# Altium PCB Button_PCB.PcbDoc
Units mil, origin at the board's own origin, x right, y up, seen from the top; angles counter-clockwise.
Board outline 2050 x 2020 mil, 2 copper layers (Top Layer, Bottom Layer); 5 components, 38 nets, 22 pads, 0 vias.
Unrouted connection lines stored in the file: 1.
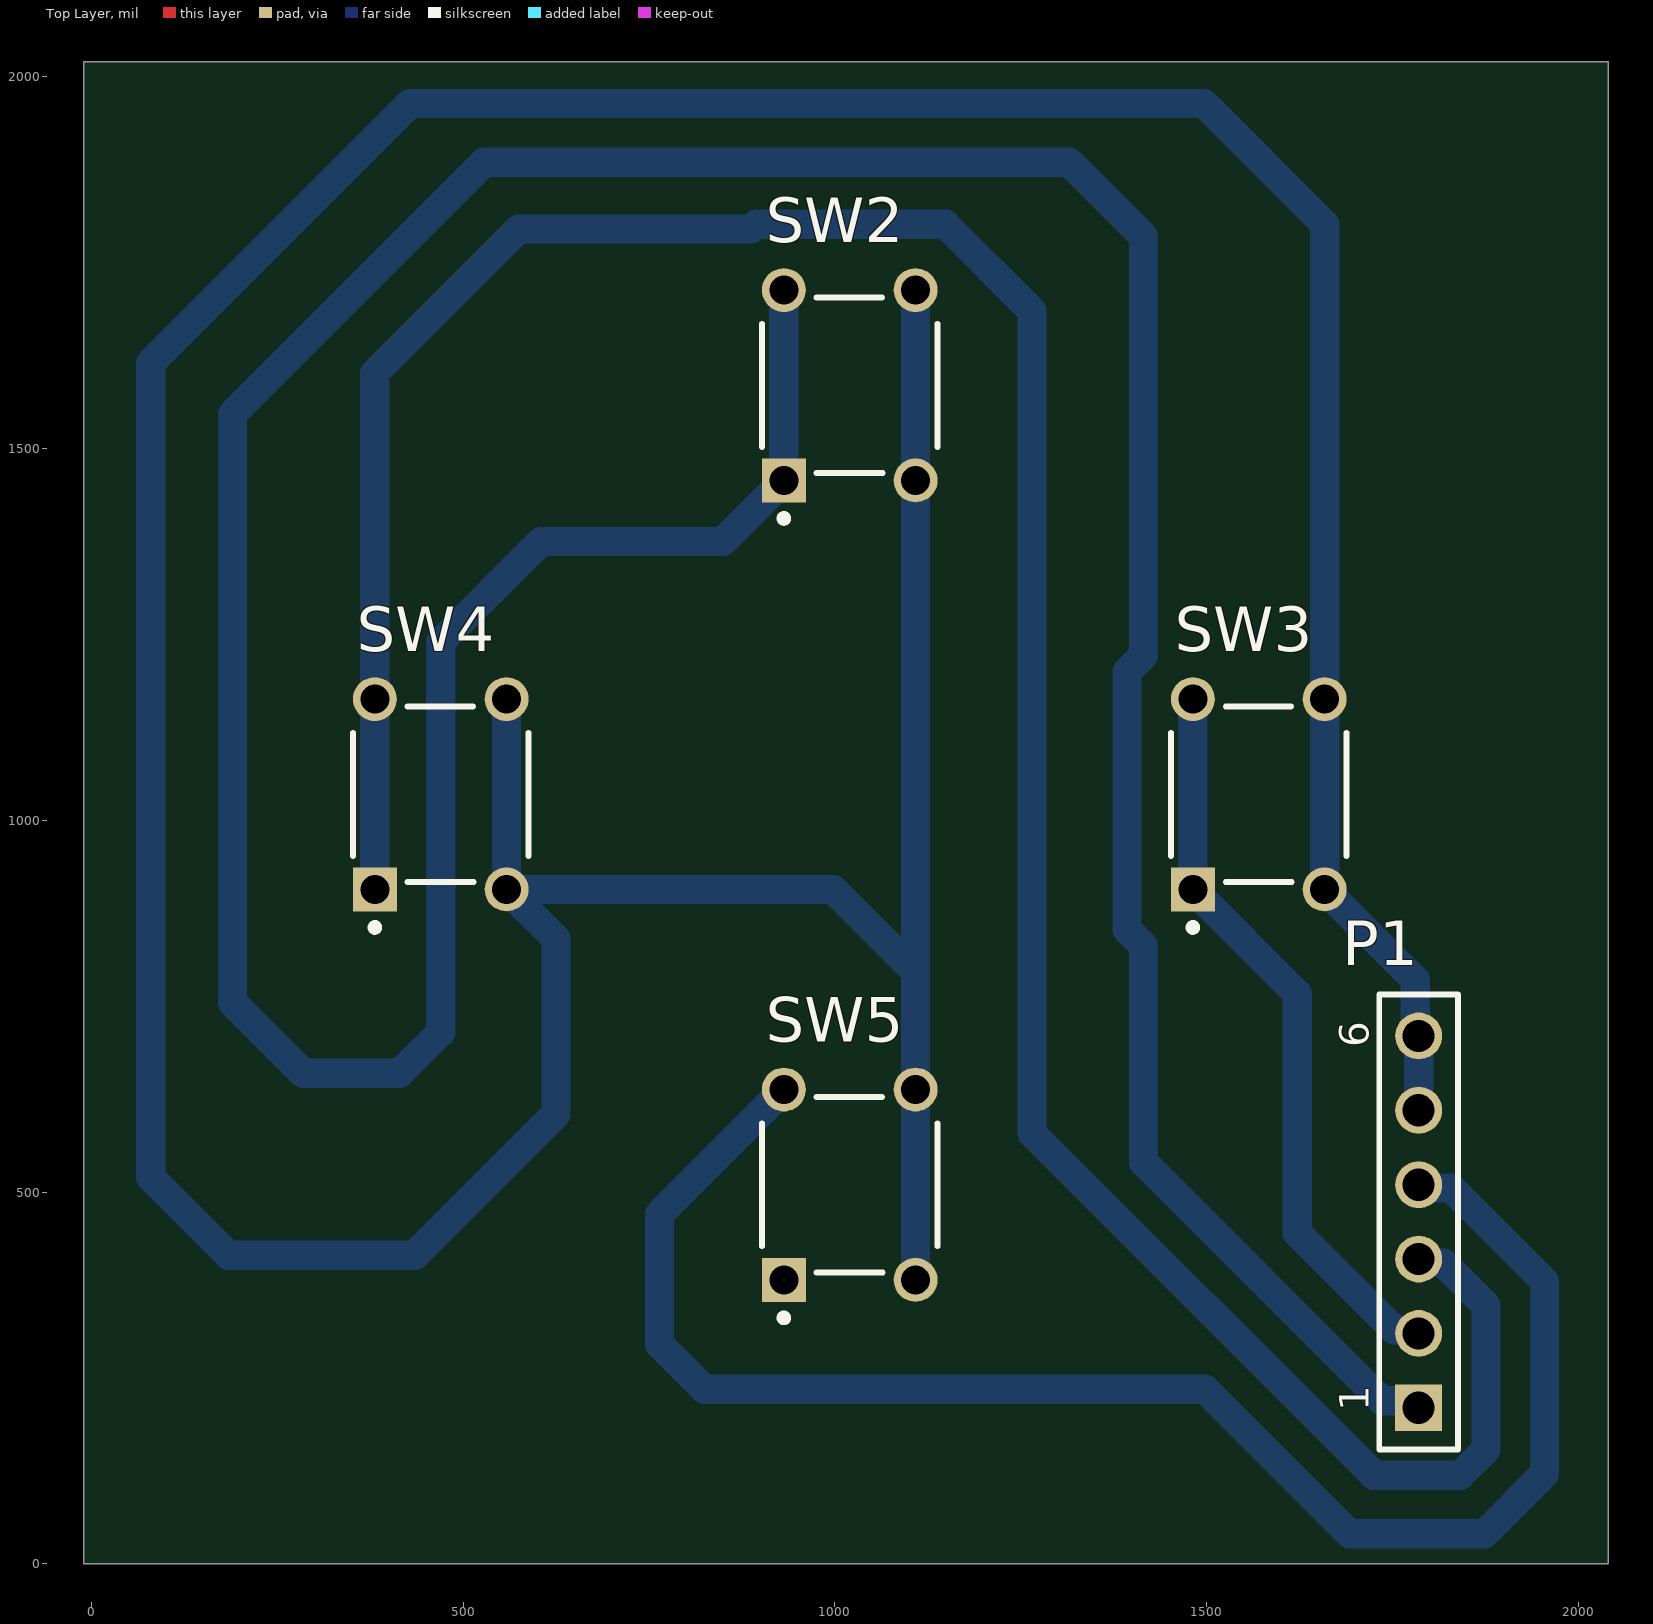
[diagram p0: Top Layer view]
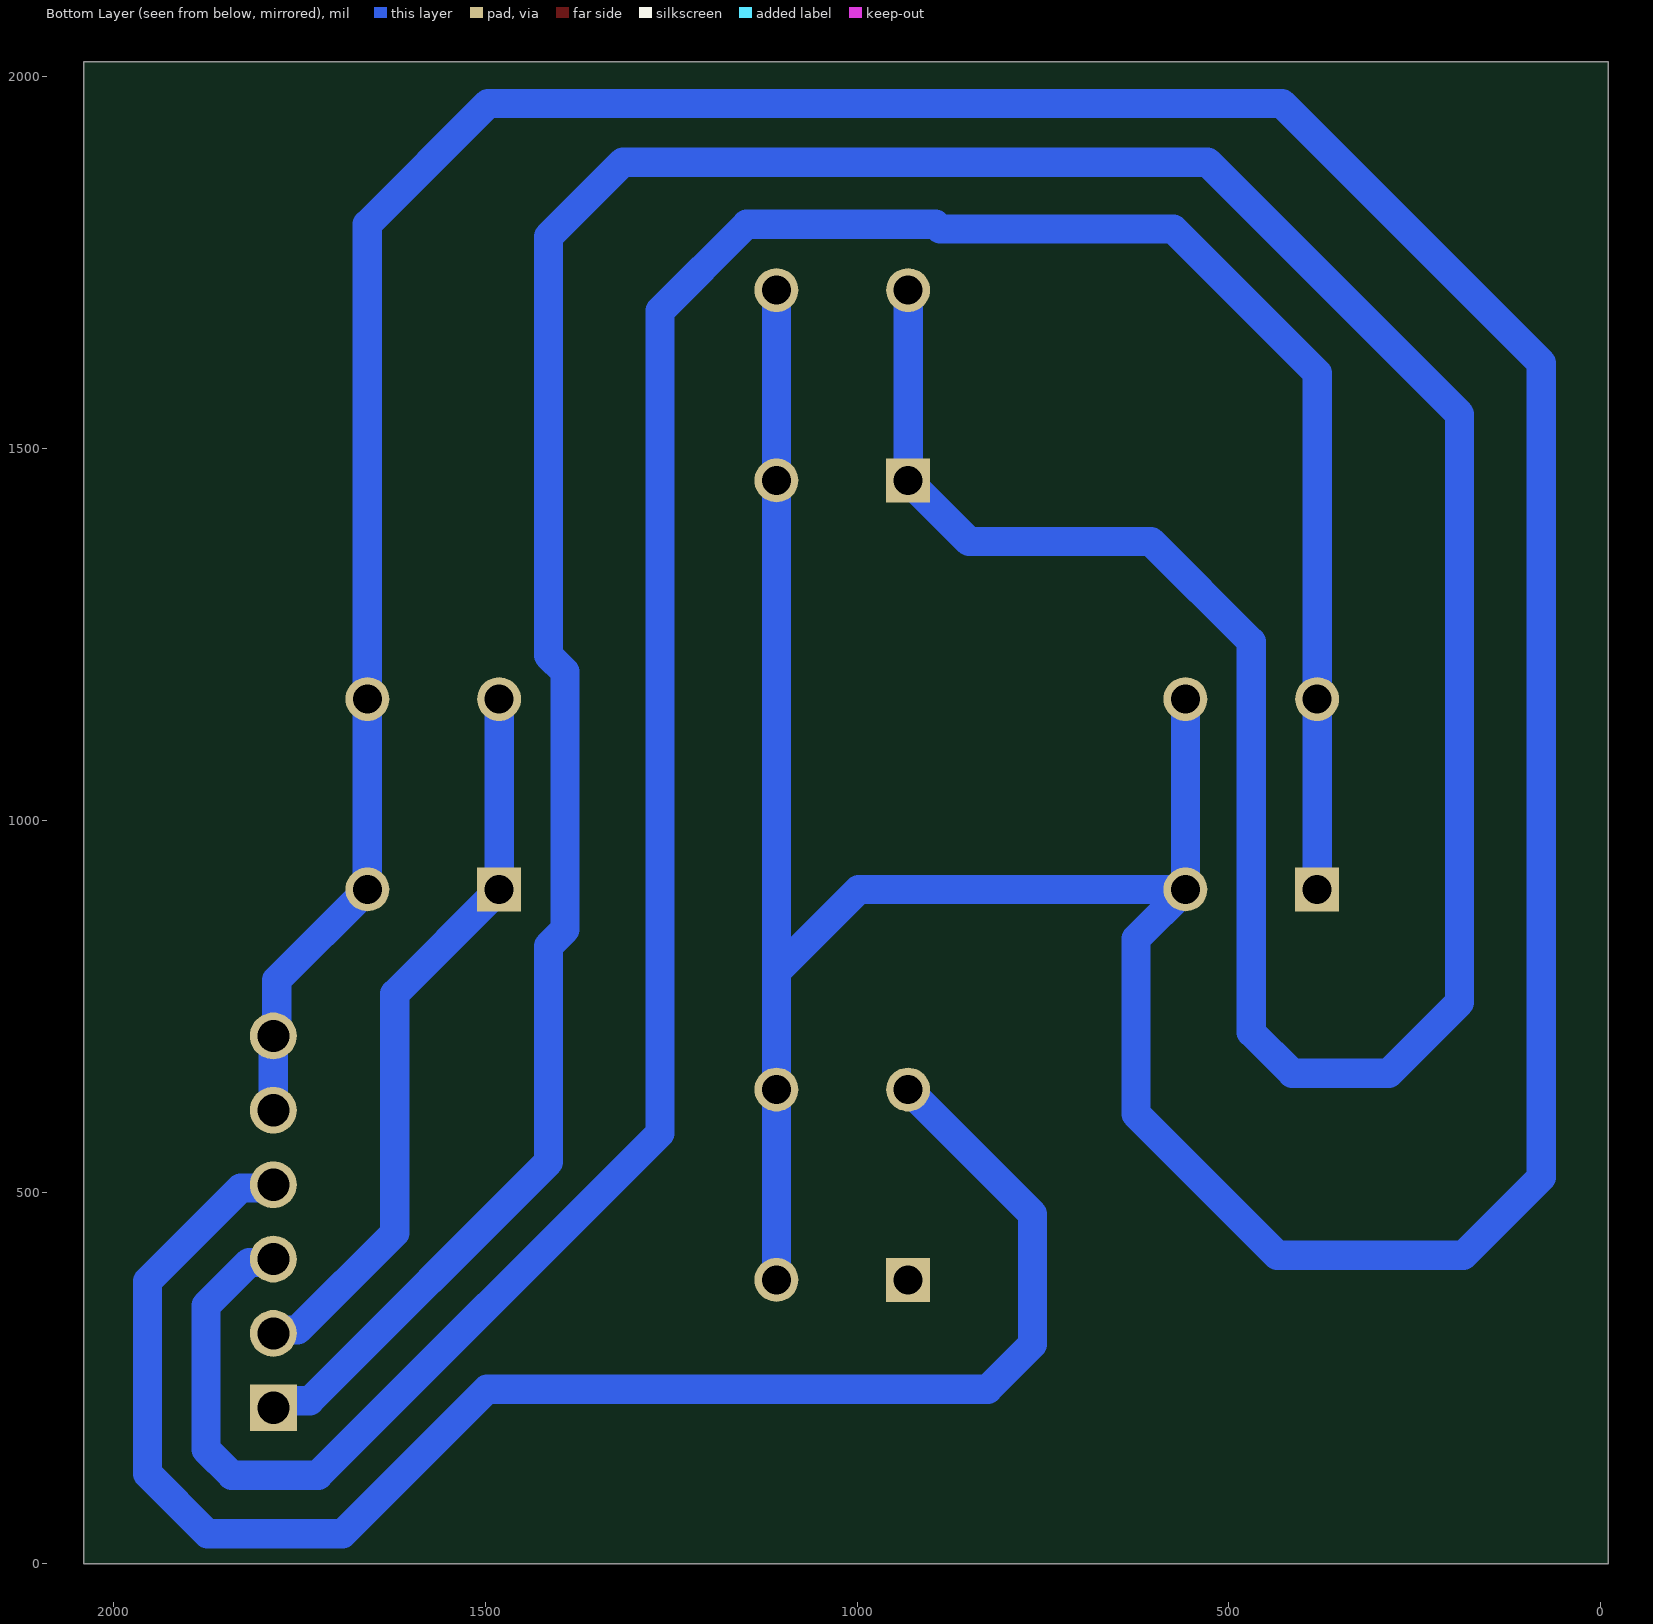
[diagram p1: Bottom Layer view, seen from below]

## Layer stack, top to bottom
Top Solder: solder mask 0.4, Solder Resist, Dk 3.5
Top Layer: signal copper 1.4
Dielectric 1: dielectric 12.6, FR-4, Dk 4.8
Bottom Layer: signal copper 1.4
Bottom Solder: solder mask 0.4, Solder Resist, Dk 3.5

## Board outline
-10,0 2040,0 2040,2020 -10,2020

## Design rules (kind name [scope] priority, off if disabled: settings)
Clearance [All] p1: gap=39.37 ignorepadtopadclearanceinfootprint=FALSE
PolygonConnect [All] p1: connectstyle=Relief reliefconductorwidth=10 reliefentries=4 polygonreliefangle="90 Angle" airgapwidth=10
RoutingVias [All] p1: holewidth=28 width=50 viastyle="Through Hole" minholewidth=28 minwidth=50 maxholewidth=28 maxwidth=50
SolderMaskExpansion [All] p1: expansion=4 istentingtop=FALSE
Width [All] p1: maxlimit=59.06 minlimit=10 preferedwidth=39.37
30 further rules are at their usual default settings.

## Components (designator, comment, footprint, x,y, rotation, side; value= is the part's Value field where it differs from the comment)
P1 "61300611121" 61300611121 1785,460 r90 top
SW2 "1825910-6" TECO-1825910-6_V 1020,1585 r90 top
SW3 "1825910-6" TECO-1825910-6_V 1570,1035 r90 top
SW4 "1825910-6" TECO-1825910-6_V 470,1035 r90 top
SW5 "1825910-6" TECO-1825910-6_V 1020,510 r90 top

## Footprints (in the part's own frame and the unit in brackets; to place one, negate y for a bottom-side part, rotate by r counter-clockwise, add the part's x,y. Pads: shape width x height; smd on the part's side, far side on the other; paste and mask are expansions set on the pad)
61300611121 [mm] "Pin Header, pitch 2.54 mm, THT, Vertical, single row, 6p"
  rect 1.6x1.6 hole 1.1: 1(-6.35,0)
  round 1.6 hole 1.1: 2(-3.81,0) 3(-1.27,0) 4(1.27,0) 5(3.81,0) 6(6.35,0)
  silkscreen extent -7.77,-1.35 7.77,1.35, body extent -7.62,-1.27 7.62,1.27, height 8.57
TECO-1825910-6_V [mm] "Switch, 4-Leads, Body 5.99x5.99mm"
  rect 1.5x1.5 hole 0.99: 1(-3.25,2.25)
  round 1.5 hole 0.99: 2(3.25,2.25) 3(-3.25,-2.25) 4(3.25,-2.25)
  silkscreen extent -4.67,-2.99 2.99,3, body extent -3,-2.99 2.99,3, height 5

## Part data
P1: library part CMP-1502-01070-1, "THT Vertical Pin Header WR-PHD, Pitch 2.54 mm, Single Row, 6 pins", Contact Resistance=20mOhm, Manufacturer="Wurth Elektronik", Operating Temperature=-40to105degC, Rated Current=3A, Withstanding Voltage=500VAC, Working Voltage=250VAC, Datasheet URL=https://katalog.we-online.de/em/datasheet/6130xx11121.pdf, Gender=Male, Manufacturer URL=http://www.we-online.de, Mounting Technology=THT, Orientation=Vertical, Package Reference=61300611121, Packaging=Bag, Part Number=61300611121, Pin Number=6, Pitch=2.54mm, Publisher=WurthElektronik, Row Number=Single
SW2 SW3 SW4 SW5: library part CMP-1684-00021-1, "Tact Switch, SPST-NO, 0.05 A, -35 to 85 degC, 4-Pin THD, RoHS, Bulk", Actuator Color=Black, Contact Rating @ Voltage=0.05A@24VDC, Dielectric Strength=500VAC, Manufacturer="TE Connectivity", Maximum AC Voltage Rating=N/A, Maximum Contact Resistance=100mOhm, Maximum DC Voltage Rating=24V, Minimum Insulation Resistance=100MOhm, Operating Temperature=-35to85C, Package Description="4-Pin Through Hole Device, Body 5.99 x 5.99 mm, Pitch 6.5 mm", Package Reference=THD, Actuator Length=1.4mm, Actuator Material=PolybutyleneTerephthalate, Actuator Style=RoundButton, Base Material=N/A, Body Orientation=Straight, Bushing Type=Unthreaded, Contact Material=CopperAlloy, Contact Plating=Silver, Datasheet URL=http://www.te.com/commerce/DocumentDelivery/DDEController?Action=showdoc&DocId=Customer+Drawing%7F1825910%7FC9%7Fpdf%7FEnglish%7FENG_CD_1825910_C9.pdf%7F1825910-6, Datasheet Version="Rev. C9", Dimension=5.99x5mm, Electrical Life=100000Cycles, Family=1825910, Function=MomentaryContact, Housing Material=N/A, Illumination=N/R, Manufacturer URL=http://www.te.com, Mechanical Life=100000Cycles, Mounting=ThroughHole, Packaging=N/A, Part No=1825910-6, Pole Throw Configuration=SPST, Product Weight=N/A, RoHS=Yes, Seal Description=N/A, Seal Location=N/A, Switch Configuration=OFF(ON), Terminal Type=PCPins, Thread Size=N/R

## Nets (pads, with @x,y where several pads share a name; then routed paths per layer and width w, separated by ;. In a path a pad name is that pad's centre, name@x,y a point inside that pad or via, vN(x,y) a via of type N, cw(c..) or ccw(c..) an arc to the next point about the centre after c; other vN are vias at no path point)
+5: 
Buzzer-: 
Cswt-: 
GND: P1.5 P1.6 SW2.3 SW2.4 SW3.3 SW3.4 SW4.3 SW4.4 SW5.3 SW5.4 | length 7313.8
  Bottom Layer w39.37: SW4.4 SW4.3 ; SW5.3@1104.82,378.28 SW5.3 SW5.4 1108.58,796.42 ; SW2.4 SW2.3 1108.58,796.42 ; P1.5 P1.6 1780.48,714.52 1780.48,785.15 SW3.3 SW3.4 1658.58,1801.42 1496.26,1963.74 428.74,1963.74 80,1615 80,520 185,415 435,415 625,605 625,840.63 SW4.3 ; SW4.3 997.95,907.05 1108.58,796.42
Load-: 
Net9_1: 
Net11_2: 
Net12_1: 
NetC1_1: 
NetDS1_1: 
NetJ2_6: 
NetJ2_7: 
NetQ1_1: 
PB0: 
PB1: 
PB2: 
PB3: 
PB4: 
PB5: 
PC0: 
PC1: 
PC2: 
PC3: 
PC4: 
PC5: 
PC6: 
PD0: 
PD1: 
PD2: 
PD3: 
PD4: 
PD5: 
PD6: 
PD7: 
SW1: P1.1 SW2.1 SW2.2 | length 5642
  Bottom Layer w39.37: SW2.2 SW2.1 849.37,1375 605,1375 470,1240 470,715 415,660 285,660 190,755 190,1546.12 528.88,1885 1315,1885 1415,1785 1415,1221.81 1392.83,1199.64 1392.83,853.06 1415,830.89 1415,540.59 1736.14,219.45 1775.55,219.45 P1.1
SW2: P1.2 SW3.1 SW3.2 | length 995.1
  Bottom Layer w39.37: SW3.2 SW3.1 1621.84,766.62 1621.84,445.1 1752.42,314.52 1780.48,314.52 P1.2
SW3: P1.3 SW4.1 SW4.2 | length 3940.1
  Bottom Layer w39.37: SW4.1 SW4.2 381.42,1601.42 575,1795 888.19,1795 894.73,1801.54 1148.46,1801.54 1265,1685 1265,579.23 1724.78,119.45 1840.96,119.45 1875.55,154.04 1875.55,347.51 1817.58,405.48 1789.52,405.48 P1.3
SW4: P1.4 SW5.1 SW5.2 | length 2222.7
  Bottom Layer w39.37: SW5.2 764.09,470.63 764.09,295.44 824.54,235 1497.88,235 1692.17,40.71 1873.57,40.71 1954.29,121.43 1954.29,380.12 1828.93,505.48 1789.52,505.48 P1.4

## Text inside footprints (layer, text, board x,y; h text height)
P1: Top Overlay "1" at 1718.07,205.28 h40 r90; Top Overlay "6" at 1718.07,695.04 h40 r90